# Allegro board AVRUSB500_orig.brd
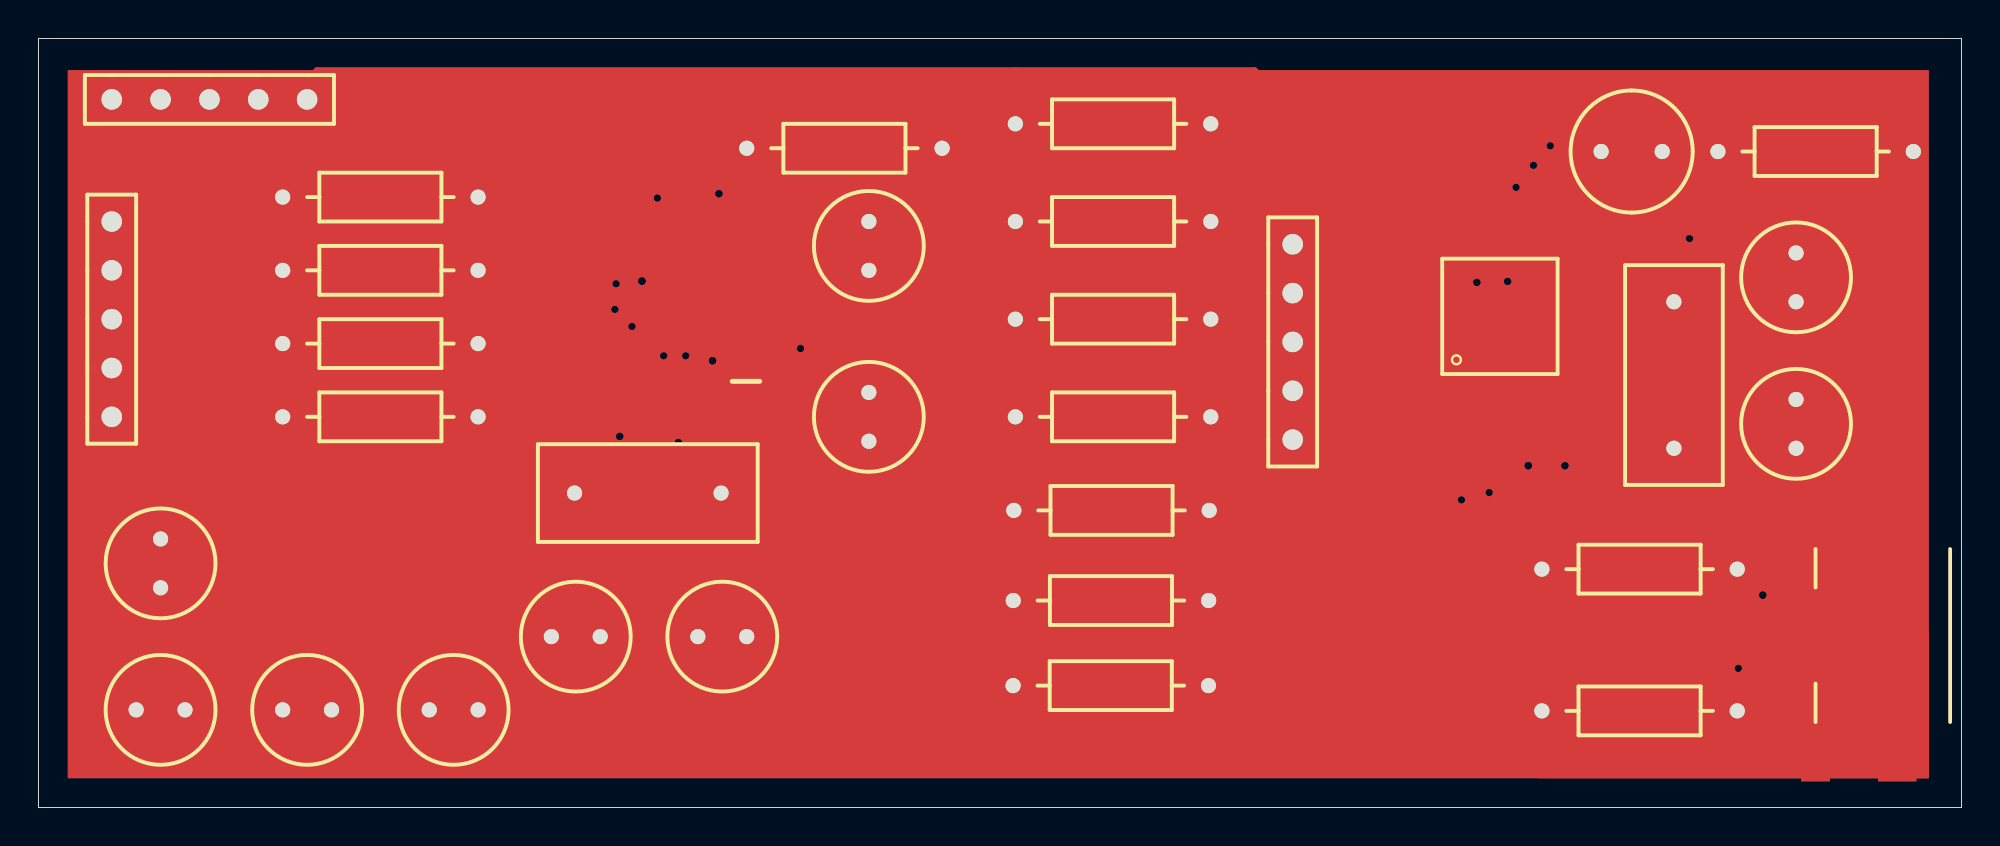
[diagram p0: board, top side]
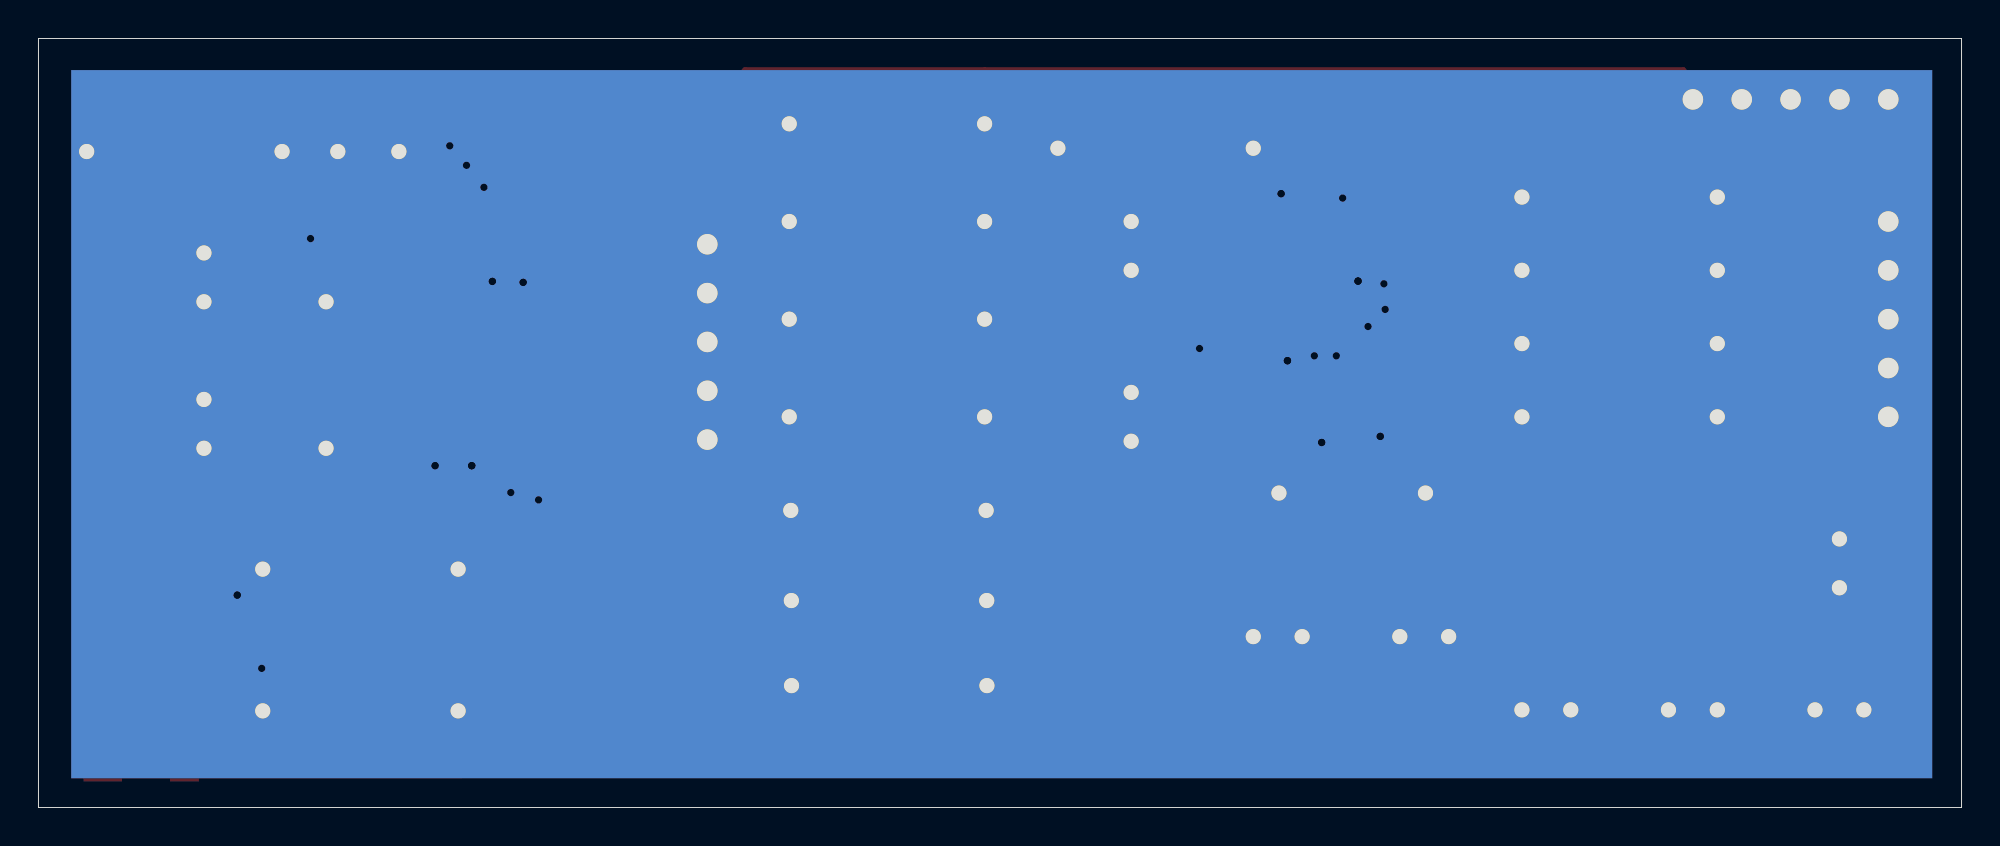
[diagram p1: board, bottom side, seen from below]

Outline 100 x 40 mm; copper layers: TOP, GND, POWER, BOTTOM. Coordinates in mm from the lower left corner of the outline.
Outline path: 0,40 0,0 100,0 100,40 0,40

## Design rules (mm)
net group NO_TYPE: nets +5V BMISO BMOSI BRESET BSCK D+ D- F_MISO F_MOSI F_SCK GND MISO MOSI N02483 N02615 N03527 N06839 N06967 N07033 N07247 N11951 N15182 N15289 N19734 N20572 N22544 N41098 N41106 N49165 RESET RXD SCK TXD VCC

## Placement (name value [footprint] x y rotation side)
C1  47nF  [CPCYL1D225LS100031]  43.18 21.59 270 top
C2  47nF  [CPCYL1D225LS100031]  36.83 8.89 180 top
C3  47nF  [CPCYL1D225LS100031]  26.67 8.89 0 top
C4  47nF  [CPCYL1D225LS100031]  43.18 27.94 90 top
C5  47nF  [CPCYL1D225LS100031]  12.7 5.08 0 top
C6  1uF  [CPCYL1D225LS100031]  7.62 5.08 180 top
C7  47nF  [CPCYL1D225LS100031]  91.39 21.23 270 top
C8  47nF  [CPCYL1D225LS100031]  91.39 28.84 270 top
C9  47nF  [CPCYL1D225LS100031]  20.32 5.08 0 top
C10  47nF  [CPCYL1D225LS100031]  6.35 11.43 90 top
D1  LED  [CYLD250LS125031]  84.43 34.12 180 top
IC1  ATmega8  [JEDECMS026]  73.19 22.05 90 top
J1  bbpg_Bitbang  [BLKCON100VHTM1SQSW1005J1]  3.81 30.48 270 top
J2  USBA  [USBMINIB]  92.41 10.45 270 top
J3  avrusb500_out  [BLKCON100VHTM1SQSW1005J3]  65.22 29.3 270 top
J4  firmware_in  [BLKCON100VHTM1SQSW1005J4]  13.97 36.83 180 top
R1  470  [AX400X100031]  50.72 15.45 0 top
R2  470  [AX400X100031]  22.86 20.32 180 top
R3  470  [AX400X100031]  22.86 24.13 180 top
R4  470  [AX400X100031]  22.86 27.94 180 top
R5  470  [AX400X100031]  60.84 6.34 180 top
R6  470  [AX400X100031]  60.85 10.77 180 top
R7  470  [AX400X100031]  36.83 34.29 0 top
R8  470  [AX400X100031]  88.34 5.03 180 top
R9  470  [AX400X100031]  88.34 12.4 180 top
R10  470  [AX400X100031]  87.33 34.12 0 top
R11  470  [AX400X100031]  50.8 20.32 0 top
R12  470  [AX400X100031]  50.8 25.4 0 top
R13  470  [AX400X100031]  50.8 30.48 0 top
R14  470  [AX400X100031]  22.86 31.75 180 top
R15  470  [AX400X100031]  60.96 35.56 180 top
U1  FT232BM  [QUAD80M32WG900]  36.83 22.86 90 top
Y1  3.6864Mhz  [RAD450X200LS300031]  85.05 26.3 270 top
Y2  3.6864Mhz  [RAD450X200LS300031]  35.49 16.36 180 top

## Library data of the parts
C1-C5 C7-C10 = CAPACITORNONPOL
C6 = CAPACITOR_POL
D1 = LED
IC1 = ATMEGA8DIL28IC1
J1 J3 J4 = CON5: alternate symbols: (BLKCON100VHTM1SQSW1005J3;BLKCON100VHTM1SQSW1005J4)
J2 = CON4_J2
R1-R15 = R
U1 = FT232BM_2
Y1 Y2 = ZTA

## Footprints (pads in the part's own frame, mm; a bottom-side part is the same pattern mirrored in y, then rotated)
AX400X100031
  round 1.321 hole 0.787: 1(0,0) 2(10.16,0)
BLKCON100VHTM1SQSW1005J1
  rect 1.575x1.575 hole 1.067: 1(0,0)
  round 1.575 hole 1.067: 2(2.54,0) 3(5.08,0) 4(7.62,0) 5(10.16,0)
BLKCON100VHTM1SQSW1005J3
  rect 1.575x1.575 hole 1.067: 1(0,0)
  round 1.575 hole 1.067: 2(2.54,0) 3(5.08,0) 4(7.62,0) 5(10.16,0)
BLKCON100VHTM1SQSW1005J4
  rect 1.575x1.575 hole 1.067: 1(0,0)
  round 1.575 hole 1.067: 2(2.54,0) 3(5.08,0) 4(7.62,0) 5(10.16,0)
CPCYL1D225LS100031
  rect 1.321x1.321 hole 0.787: 1(0,0)
  round 1.321 hole 0.787: 2(2.54,0)
CYLD250LS125031
  rect 1.321x1.321 hole 0.787: 1(0,0)
  round 1.321 hole 0.787: 2(3.175,0)
JEDECMS026
  rect 2.54x0.4 smd: 1(0,0) 2(0,-0.8) 3(0,-1.6) 4(0,-2.4) 5(0,-3.2) 6(0,-4) 7(0,-4.8) 8(0,-5.6) 17(7,-5.6) 18(7,-4.8) 19(7,-4) 20(7,-3.2) 21(7,-2.4) 22(7,-1.6) 23(7,-0.8) 24(7,0)
  rect 0.4x2.54 smd: 9(0.7,-6.3) 10(1.5,-6.3) 11(2.3,-6.3) 12(3.1,-6.3) 13(3.9,-6.3) 14(4.7,-6.3) 15(5.5,-6.3) 16(6.3,-6.3) 25(6.3,0.7) 26(5.5,0.7) 27(4.7,0.7) 28(3.9,0.7) 29(3.1,0.7) 30(2.3,0.7) 31(1.5,0.7) 32(0.7,0.7)
QUAD80M32WG900
  rect 0.457x1.778 smd: 1(0,0) 20(3.2,8.496)
  oval 0.457x1.778 smd: 2(0.8,0) 3(1.6,0) 4(2.4,0) 5(3.2,0) 6(4,0) 7(4.801,0) 8(5.601,0) 17(5.601,8.496) 18(4.801,8.496) 19(4,8.496) 21(2.4,8.496) 22(1.6,8.496) 23(0.8,8.496) 24(0,8.496)
  oval 1.778x0.457 smd: 9(7.048,1.448) 11(7.048,3.048) 12(7.048,3.848) 13(7.048,4.648) 14(7.048,5.448) 15(7.048,6.248) 16(7.048,7.048) 25(-1.448,7.048) 26(-1.448,6.248) 27(-1.448,5.448) 28(-1.448,4.648) 29(-1.448,3.848) 31(-1.448,2.248) 32(-1.448,1.448)
  rect 1.778x0.457 smd: 10(7.048,2.248) 30(-1.448,3.048)
RAD450X200LS300031
  round 1.321 hole 0.787: 1(0,0) 2(7.62,0)
USBMINIB
  rect 0.5x2.25 smd: 1(0,0) 2(0.798,0) 3(1.595,0) 4(2.393,0) 5(3.19,0)
  rect 2x1.5 smd: SHIELD1(-4.9,0) SHIELD2(8.09,0)
  rect 2x2 smd: SHIELD3(-4.9,4.25) SHIELD4(8.09,4.25)

## Nets
+5V: J2.4 R8.1(TP-1)
GND: C1.1(TP-1) C2.1(TP-1) C3.1(TP-1) C4.2(TP-2) C5.2(TP-2) C6.2(TP-2) C7.1(TP-1) C8.1(TP-1) C9.2(TP-2) C10.1(TP-1) IC1.8(TP-8) IC1.22(TP-22) J1.5(TP-5) J2.1 J3.5(TP-5) J4.5(TP-5) U1.9(TP-9) U1.14(TP-14) U1.17(TP-17) U1.29(TP-29) U1.31(TP-31)
VCC: C5.1(TP-1) C6.1(TP-1) C9.1(TP-1) IC1.7(TP-7) IC1.20(TP-20) R1.2(TP-2) R8.2(TP-2) R9.1(TP-1) R10.2(TP-2) U1.3(TP-3) U1.4(TP-4) U1.13(TP-13) U1.26(TP-26)
BMISO: J1.3(TP-3) R3.2(TP-2)
BMOSI: J1.2(TP-2) R4.2(TP-2)
BRESET: J1.1(TP-1) R14.2(TP-2)
BSCK: C10.2(TP-2) J1.4(TP-4) R2.2(TP-2)
D+: J2.2 R6.1(TP-1)
D-: J2.3 R5.1(TP-1)
F_MISO: IC1.18(TP-18) J4.3(TP-3) R12.1(TP-1)
F_MOSI: IC1.17(TP-17) J4.2(TP-2) R13.1(TP-1)
F_SCK: IC1.19(TP-19) J4.4(TP-4) R11.1(TP-1)
MISO: J3.3(TP-3) R12.2(TP-2)
MOSI: J3.2(TP-2) R13.2(TP-2)
RESET: IC1.1(TP-1) J3.1(TP-1) J4.1(TP-1) R9.2(TP-2) R15.2(TP-2)
RXD: IC1.2(TP-2) U1.24(TP-24)
SCK: J3.4(TP-4) R11.2(TP-2)
TXD: IC1.3(TP-3) U1.25(TP-25)
N02483: R6.2(TP-2) R7.1(TP-1) U1.7(TP-7)
N02615: R5.2(TP-2) U1.8(TP-8)
N03527: C4.1(TP-1) U1.6(TP-6)
N06839: R2.1(TP-1) U1.21(TP-21)
N06967: R3.1(TP-1) U1.20(TP-20)
N07033: R4.1(TP-1) U1.19(TP-19)
N07247: R14.1(TP-1) U1.18(TP-18)
N11951: R7.2(TP-2) U1.5(TP-5)
N15182: C7.2(TP-2) IC1.9(TP-9) Y1.2(TP-2)
N15289: C8.2(TP-2) IC1.10(TP-10) Y1.1(TP-1)
N19734: D1.2(TP-2) IC1.23(TP-23)
N20572: D1.1(TP-1) R10.1(TP-1)
N22544: IC1.16(TP-16) R15.1(TP-1)
N41098: C3.2(TP-2) U1.27(TP-27) Y2.2(TP-2)
N41106: C2.2(TP-2) U1.28(TP-28) Y2.1(TP-1)
N49165: C1.2(TP-2) R1.1(TP-1) U1.30(TP-30)

Pads without a net: IC1 4 5 6 11 12 13 14 15 21 24 25 26 27 28 29 30 31 32; J2 5 SHIELD1 SHIELD2 SHIELD3 SHIELD4; U1 1 2 10 11 12 15 16 22 23 32

## Via types
v1: diameter 0.762, hole 0.381, TOP to BOTTOM, 37 vias

## Routing (per net, layer and track width the routed paths; a pad name or vN(x,y) marks a point on that pad's centre or on a via; arc(x,y) is an arc through that point)
+5V: length 6.6
  TOP w0.3: v1(88.39,7.24) 89.21,8.05 J2.4
  TOP w0.8: v1(88.39,7.24) 88.34,7.18 R8.1
GND: length 20.9
  TOP w0.3: v1(31.38,27.38) U1.14 ; v1(35.05,23.24) 34.58,22.77 U1.31 ; v1(89.66,11.05) 90.27,10.45 J2.1 ; v1(30.04,27.24) 30.04,27.88 29.45,28.46 U1.17 ; U1.9 v1(35.38,31.93) ; v1(33.27,18.99) 32.98,19.28 U1.29 ; v1(74.8,27.31) 74.8,29.05 ; v1(79.38,17.78) 78.8,18.36 78.8,22.05
VCC: length 29.9
  TOP w0.3: v1(30.23,19.3) 30.58,19.66 U1.26 ; v1(39.62,23.88) 39.04,24.46 38.94,24.46 ; U1.4 38.62,25.26 38.99,24.89 38.99,24.51 38.94,24.46 ; v1(77.47,17.78) 78,18.3 78,22.05 ; 38.94,24.46 U1.3 ; U1.13 v1(32.18,31.7) ; v1(76.39,27.36) IC1.20
  TOP w0.8: C9.1 18.41,5.08 17.02,3.68 14.61,3.68 13.21,5.08 C5.1 C6.1
BMISO: length 9.4
  TOP w0.3: R3.2 9.02,24.13 7.75,25.4 J1.3
BMOSI: length 8.9
  TOP w0.3: J1.2 R4.2
BRESET: length 9.4
  TOP w0.3: J1.1 7.75,30.48 9.02,31.75 R14.2
BSCK: length 17.3
  TOP w0.3: 6.35,20.32 R2.2 ; 6.35,20.32 C10.2 ; 6.35,20.32 6.35,22.04 5.53,22.86 J1.4
D+: length 32
  TOP w0.3: R6.1 63.53,10.77 64.64,9.65 92.4,9.65 J2.2
D-: length 32.6
  TOP w0.3: J2.3 64.6,8.85 62.09,6.34 R5.1
F_MISO: length 87.6
  TOP w0.3: v1(77.74,33.4) 78,33.15 78,29.05
  BOTTOM w0.3: J4.3 8.89,34.29 9.84,33.34 32.26,33.34 34.8,35.88 42.86,35.88 47.69,31.05 47.69,26.48 48.77,25.4 R12.1 51.69,25.4 59.69,33.4 v1(77.74,33.4)
F_MOSI: length 82.2
  TOP w0.3: 78.8,29.05 78.74,29.1 78.74,34.29 v1(78.61,34.42)
  BOTTOM w0.3: J4.2 11.43,35.12 12.26,34.29 19.18,34.29 21.65,36.77 47.37,36.77 49.02,35.12 49.02,31.24 49.78,30.48 R13.1 52.58,30.48 56.52,34.42 v1(78.61,34.42)
F_SCK: length 95.9
  TOP w0.3: IC1.19 77.22,29.07 77.22,31.88 v1(76.83,32.26)
  BOTTOM w0.3: v1(76.83,32.26) 60.58,32.26 58.17,29.84 58.17,23.75 54.74,20.32 R11.1 49.34,20.32 48.39,21.27 48.39,23.18 47.44,24.13 40.64,24.13 39.62,25.15 39.62,28.96 38.8,29.78 7.68,29.78 6.35,31.11 J4.4
MISO: length 4.8
  TOP w0.3: J3.3 63.41,24.22 62.23,25.4 R12.2
MOSI: length 7
  TOP w0.3: J3.2 63.54,26.76 62.74,27.56 62.74,29.59 61.85,30.48 R13.2
RESET: length 96.7
  TOP w0.3: 50.8,38.35 14.48,38.35 13.97,37.85 J4.1 ; 50.8,38.35 R15.2 ; 50.8,38.35 63.25,38.35 63.88,37.72 63.88,32.51 65.22,31.17 J3.1 66.84,29.3 67.56,28.57 67.56,19.18 68.07,18.67 71.5,18.67 ; IC1.1 73.19,19.09 72.77,18.67 71.5,18.67 ; 71.5,18.67 71.5,13.21 72.31,12.4 R9.2
RXD: length 60
  TOP w0.3: v1(29.97,25.91) 29.97,23.5 29.34,22.86 U1.24 ; 74,22.05 v1(74,16)
  BOTTOM w0.3: v1(74,16) 64.26,16 62.74,17.53 42.29,17.53 38.73,21.08 38.73,23.62 36.45,25.91 v1(29.97,25.91)
SCK: length 4.8
  TOP w0.3: J3.4 63.33,21.68 61.98,20.32 R11.2
TXD: length 61.1
  TOP w0.3: v1(75.44,16.38) 74.8,17.02 74.8,22.04 74.8,22.05 ; v1(30.86,25.02) 30.86,23.5 29.78,22.42 U1.25
  BOTTOM w0.3: v1(30.86,25.02) 36.2,25.02 38.1,23.11 38.1,20.57 41.91,16.76 62.1,16.76 63.75,15.11 74.93,15.11 75.44,15.62 v1(75.44,16.38)
N02483: length 45.3
  TOP w0.3: v1(33.66,23.5) 33.66,27.05 34.27,27.66 U1.7 38.52,27.66 39.18,28.32 39.18,33.59 38.48,34.29 R7.1
  BOTTOM w0.3: R6.2 48.87,10.77 47.12,9.02 41.27,9.02 40.51,9.78 40.51,15.37 33.66,22.23 v1(33.66,23.5)
N02615: length 38.2
  TOP w0.3: v1(32.51,23.5) 32.51,27.88 33.1,28.46 U1.8
  BOTTOM w0.3: R5.2 49.03,6.34 47.18,8.19 41.02,8.19 39.62,9.59 39.62,14.92 32.51,22.04 v1(32.51,23.5)
N03527: length 6.8
  TOP w0.3: C4.1 40.45,27.94 39.37,26.86 U1.6
N06839: length 8.8
  TOP w0.3: U1.21 26.53,25.26 25.15,23.88 25.15,21.72 23.75,20.32 R2.1
N06967: length 6.3
  TOP w0.3: U1.20 26.19,26.06 24.26,24.13 R3.1
N07033: length 5.9
  TOP w0.3: R4.1 24.89,27.94 25.97,26.86 U1.19
N07247: length 8.3
  TOP w0.3: U1.18 26.31,27.66 25.02,28.96 25.02,30.86 24.13,31.75 R14.1
N11951: length 17.8
  TOP w0.3: U1.5 46,26.06 46.99,27.05 R7.2
N15182: length 15.4
  TOP w0.3: 79.5,22.75 84.06,22.75 85.05,21.76 Y1.2 91.39,18.68
N15289: length 14
  TOP w0.3: 79.5,23.55 84,23.55 85.05,24.59 Y1.1 C8.2
N19734: length 14.1
  TOP w0.3: 74,29.05 74,34.75 75.06,35.81 79.56,35.81 D1.2
N20572: length 2.9
  TOP w0.3: D1.1 R10.1
N22544: length 39
  TOP w0.3: v1(85.85,29.59) 84.61,28.35 79.5,28.35
  BOTTOM w0.3: v1(85.85,29.59) 85.85,35.56 84.33,37.08 63.63,37.08 62.1,35.56 R15.1
N41098: length 16.1
  TOP w0.3: C3.2 29.21,11.81 27.88,13.15 27.88,16.36 30.58,16.36 31.37,17.14 31.37,21.4 U1.27
N41106: length 15.7
  TOP w0.3: U1.28 32.18,17.48 33.3,16.36 Y2.1 35.49,13.14 34.29,11.94 C2.2
N49165: length 23.7
  TOP w0.3: U1.30 33.78,19.88 34.61,19.05 41.4,19.05 ; 41.4,19.05 C1.2 ; 41.4,19.05 41.4,16.26 42.2,15.45 R1.1

## Copper pours and planes (outline as drawn; the poured copper is in the pictures)
+5V on TOP (solid shape): 98.3,1.52 77.98,1.52 77.98,9.14 98.3,9.14
+5V on POWER (solid shape): 98.3,1.52 80.01,1.52 80.01,9.14 98.3,9.14
GND on BOTTOM (solid shape): 98.3,1.52 1.52,1.52 1.52,38.35 98.3,38.35
GND on GND (solid shape): 100,0 0,0 0,40 100,40
VCC on TOP (solid shape): 98.3,1.52 1.52,1.52 1.52,38.35 98.3,38.35
VCC on POWER (solid shape): 100,0 0,0 0,1.52 98.3,1.52 98.3,9.14 80.01,9.14 80.01,1.52 0,1.52 0,40 100,40
